# EAGLE board lpc_boilerplate (EAGLE 5.10)

Size 52.05 x 53.01 mm. Coordinates in mm from the lower left corner, seen from the top.
Outline: 0,0 52.05,0 52.05,53.01 0,53.01 0,0
Copper layers (1*16): Top 0.035mm / dielectric 1.5mm / Bottom 0.035mm
Design rules "default": minimum track width 10mil, minimum drill 24mil, track to track 8mil, track to pad 8mil, pad to pad 8mil, via to via 8mil, smd to smd 8mil, copper to edge 40mil, drill to drill 8mil, minimum pad ring 10mil, minimum via ring 8mil, stop-mask expansion 4mil, vias tented up to drill 0mil, thermal gap 10mil

## Footprints (pad centres in the part's own frame; a part is rotated, then mirrored left to right if it is on the bottom)
E3,5-8 = drill 0.813 pad 1.6 round: + -1.778,0 | drill 0.813 pad 1.6 octagon: - 1.778,0
C050-024X044 = drill 0.813 octagon: 1 -2.54,0; 2 2.54,0
2X10 = drill 1.016 octagon: 1 -11.43,-1.27; 2 -11.43,1.27; 3 -8.89,-1.27; 4 -8.89,1.27; 5 -6.35,-1.27; 6 -6.35,1.27; 7 -3.81,-1.27; 8 -3.81,1.27; 9 -1.27,-1.27; 10 -1.27,1.27; 11 1.27,-1.27; 12 1.27,1.27; 13 3.81,-1.27; 14 3.81,1.27; 15 6.35,-1.27; 16 6.35,1.27; 17 8.89,-1.27; 18 8.89,1.27; 19 11.43,-1.27; 20 11.43,1.27
LED10MM = drill 0.813 pad 1.676 octagon: A -1.27,0 | drill 0.813 pad 1.676 square: K 1.27,0
1X03 = drill 1.016 long: 1 -2.54,0; 2 0,0; 3 2.54,0
0207/10 = drill 0.813 octagon: 1 -5.08,0; 2 5.08,0
DIL28-6 = drill 0.813 long: 1 -16.51,-7.62; 2 -13.97,-7.62; 3 -11.43,-7.62; 4 -8.89,-7.62; 5 -6.35,-7.62; 6 -3.81,-7.62; 7 -1.27,-7.62; 8 1.27,-7.62; 9 3.81,-7.62; 10 6.35,-7.62; 11 8.89,-7.62; 12 11.43,-7.62; 13 13.97,-7.62; 14 16.51,-7.62; 15 16.51,7.62; 16 13.97,7.62; 17 11.43,7.62; 18 8.89,7.62; 19 6.35,7.62; 20 3.81,7.62; 21 1.27,7.62; 22 -1.27,7.62; 23 -3.81,7.62; 24 -6.35,7.62; 25 -8.89,7.62; 26 -11.43,7.62; 27 -13.97,7.62; 28 -16.51,7.62
TO220V = drill 1.016 long: 1 -2.54,-2.54; 2 0,-2.54; 3 2.54,-2.54

## Placement (x,y rotation side)
C1  47u  [E3,5-8]  11.43,24.13 0 top
C2  .1u  [C050-024X044]  48.26,29.21 90 top
C3  .1u  [C050-024X044]  21.59,29.21 270 top
JTAG/SWD  [2X10]  15.24,3.81 0 top
LED1  [LED10MM]  13.97,44.45 270 top
PWR  [1X03]  36.83,2.54 180 top
R1  4K7  [0207/10]  5.08,15.24 90 top
R2  50  [0207/10]  35.56,49.53 0 top
U1  LPC1114FN28/102  [DIL28-6]  35.56,29.21 270 top
U2  UA78MC  [TO220V]  15.24,13.97 180 top

## Library data of the parts
C1-C3 R1 R2 = rcl
JTAG/SWD PWR = pinhead
LED1 = led
U1 U2 = lpc_11xx

## Nets
+3V3: C1.+ C2.1 C3.1 JTAG/SWD.1 JTAG/SWD.2 LED1.A R1.2 U1.7 U1.21 U2.3
GND: C1.- C2.2 C3.2 JTAG/SWD.4 JTAG/SWD.6 JTAG/SWD.8 JTAG/SWD.10 JTAG/SWD.12 JTAG/SWD.14 JTAG/SWD.16 JTAG/SWD.18 JTAG/SWD.20 PWR.2 U1.8 U1.22 U2.2
N$1: LED1.K R2.2
N$2: PWR.1 U2.1
N$3: R2.1 U1.28
RESET: JTAG/SWD.15 R1.1 U1.23
SWCLK: JTAG/SWD.9 U1.3
SWDIO: JTAG/SWD.7 U1.12

## Tracks (layer width: path | path; a pad name or v marks a point on that pad's centre or on a via)
+3V3  (9 unrouted)
GND  (15 unrouted)
N$1  (1 unrouted)
N$2  (1 unrouted)
N$3  (1 unrouted)
RESET  (2 unrouted)
SWCLK  (1 unrouted)
SWDIO  (1 unrouted)